# Altium PCB PCB1.PcbDoc (part 1 of 2)
Units mm, origin at the board's own origin, x right, y up, seen from the top; angles counter-clockwise.
Board outline 32 x 32 mm, 4 copper layers (Component Side, Ground Plane, Power Plane, Solder Side), stack 0.844 mm thick; 67 components, 43 nets, 247 pads, 412 vias.
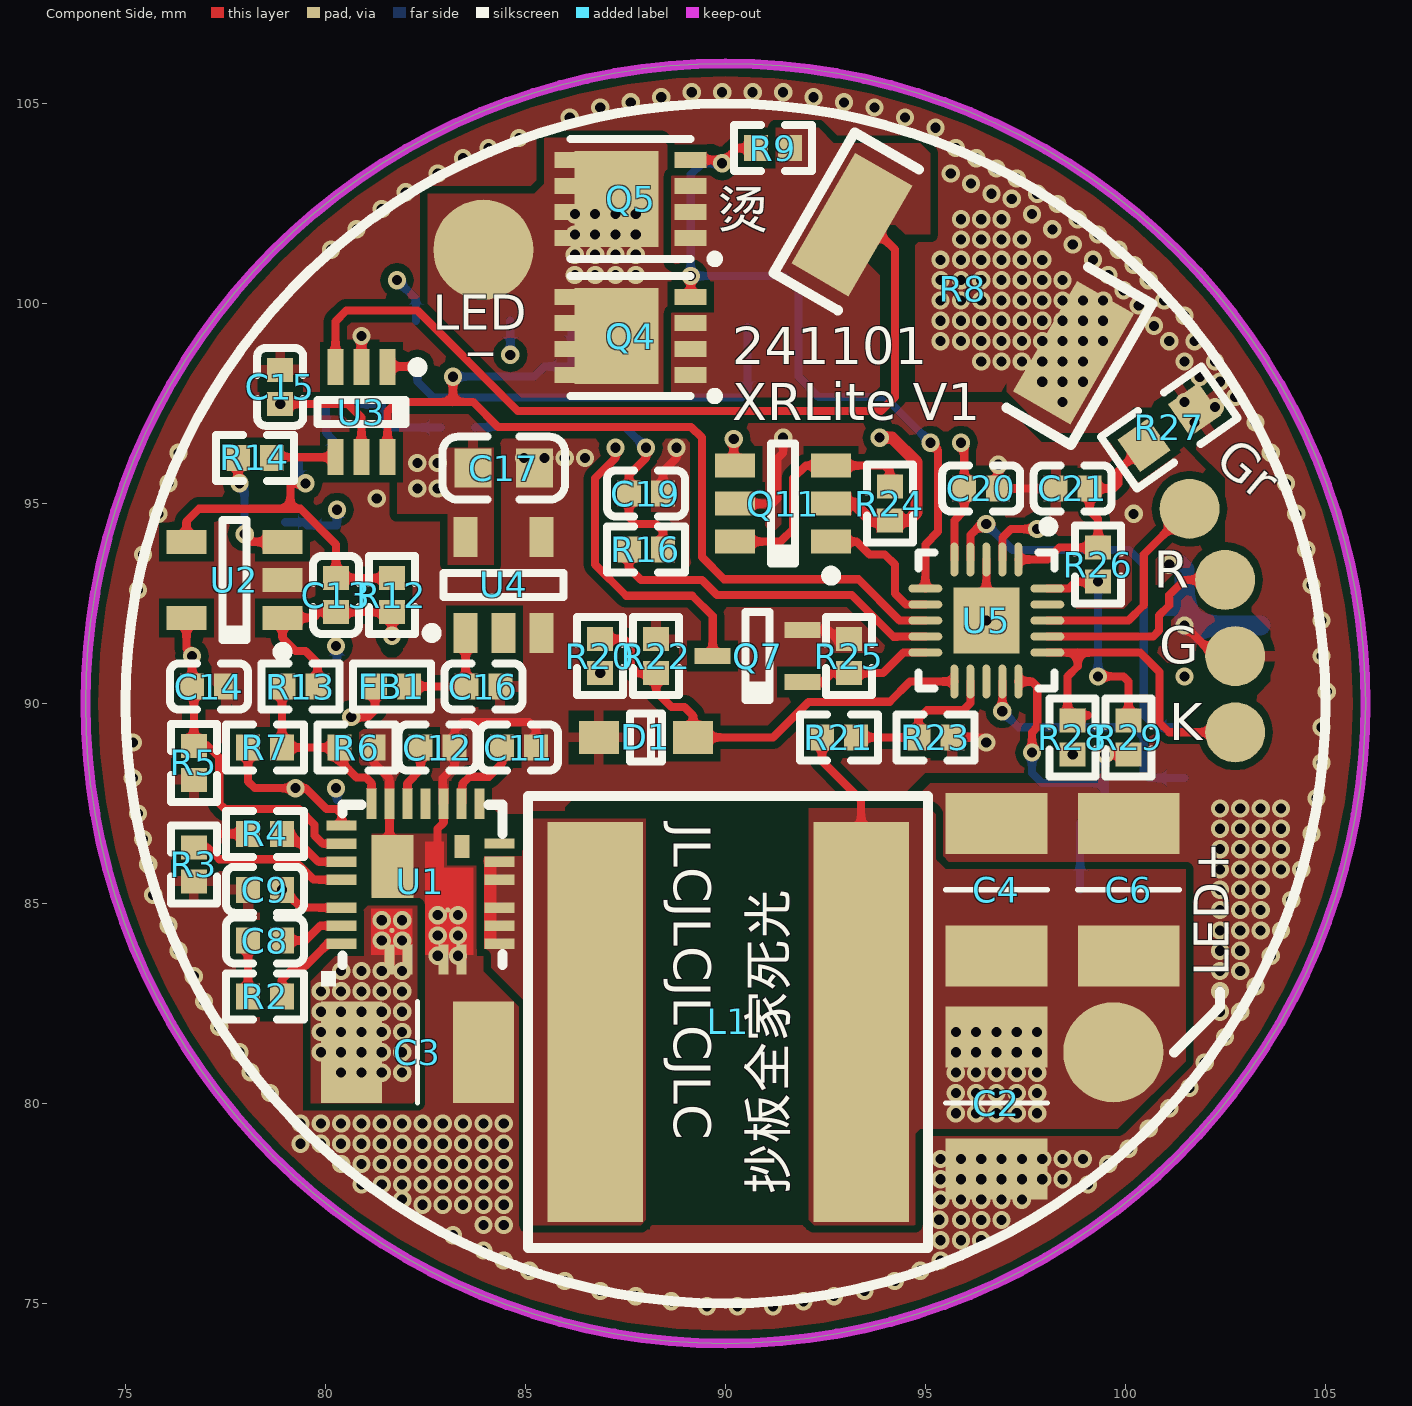
[diagram p0: Component Side view]
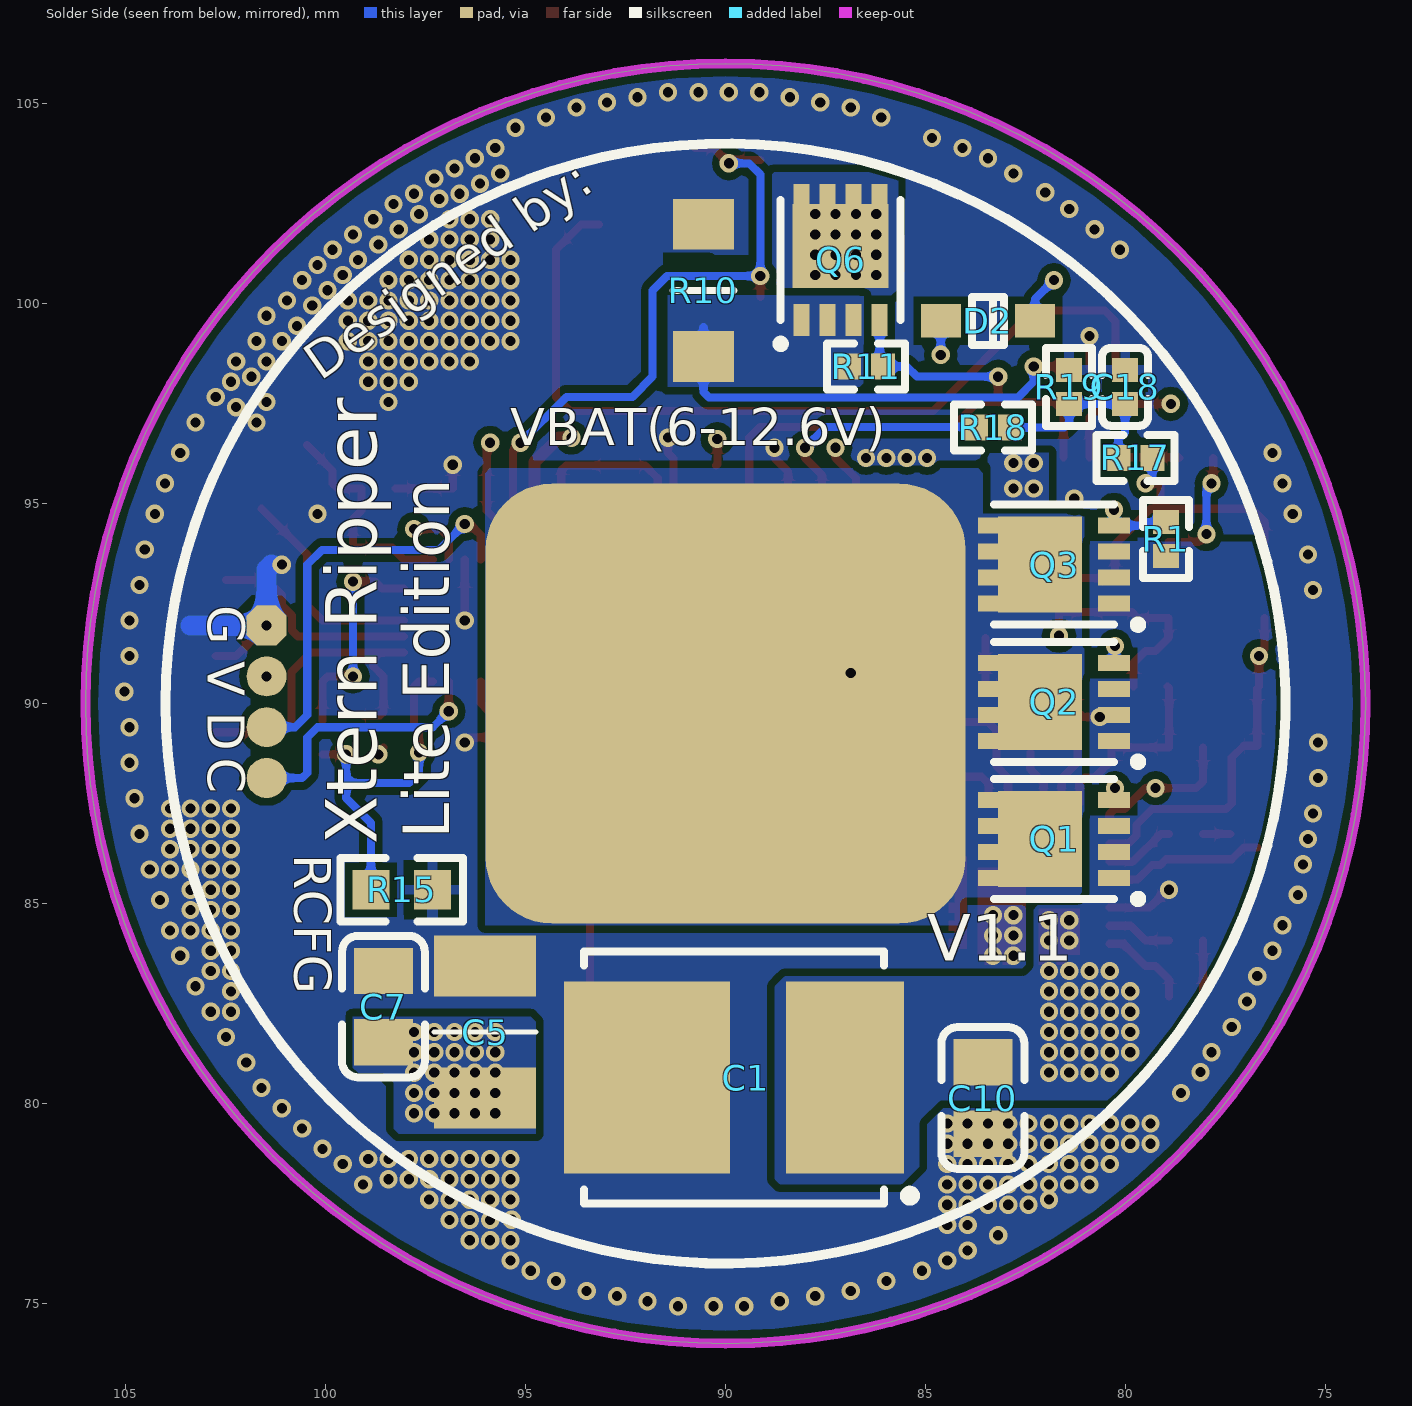
[diagram p1: Solder Side view, seen from below]
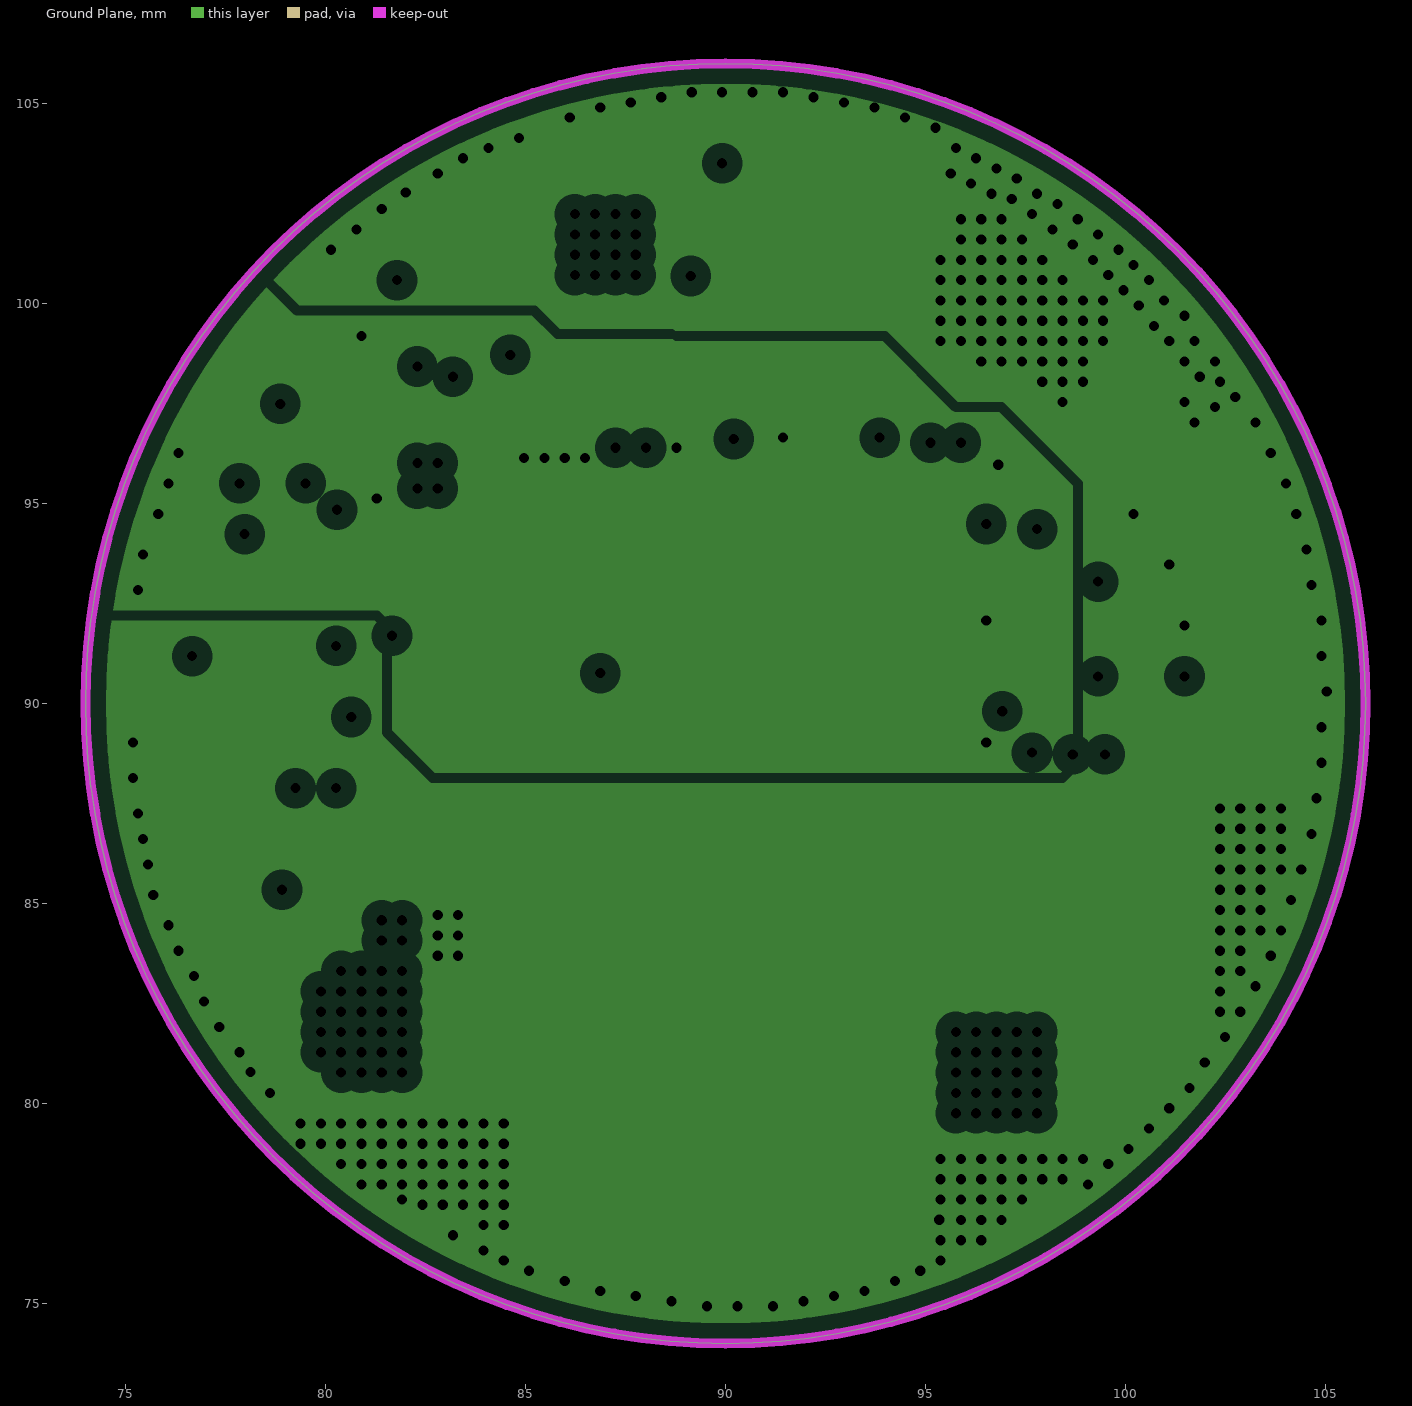
[diagram p2: Ground Plane, clearances drawn from the general rule]
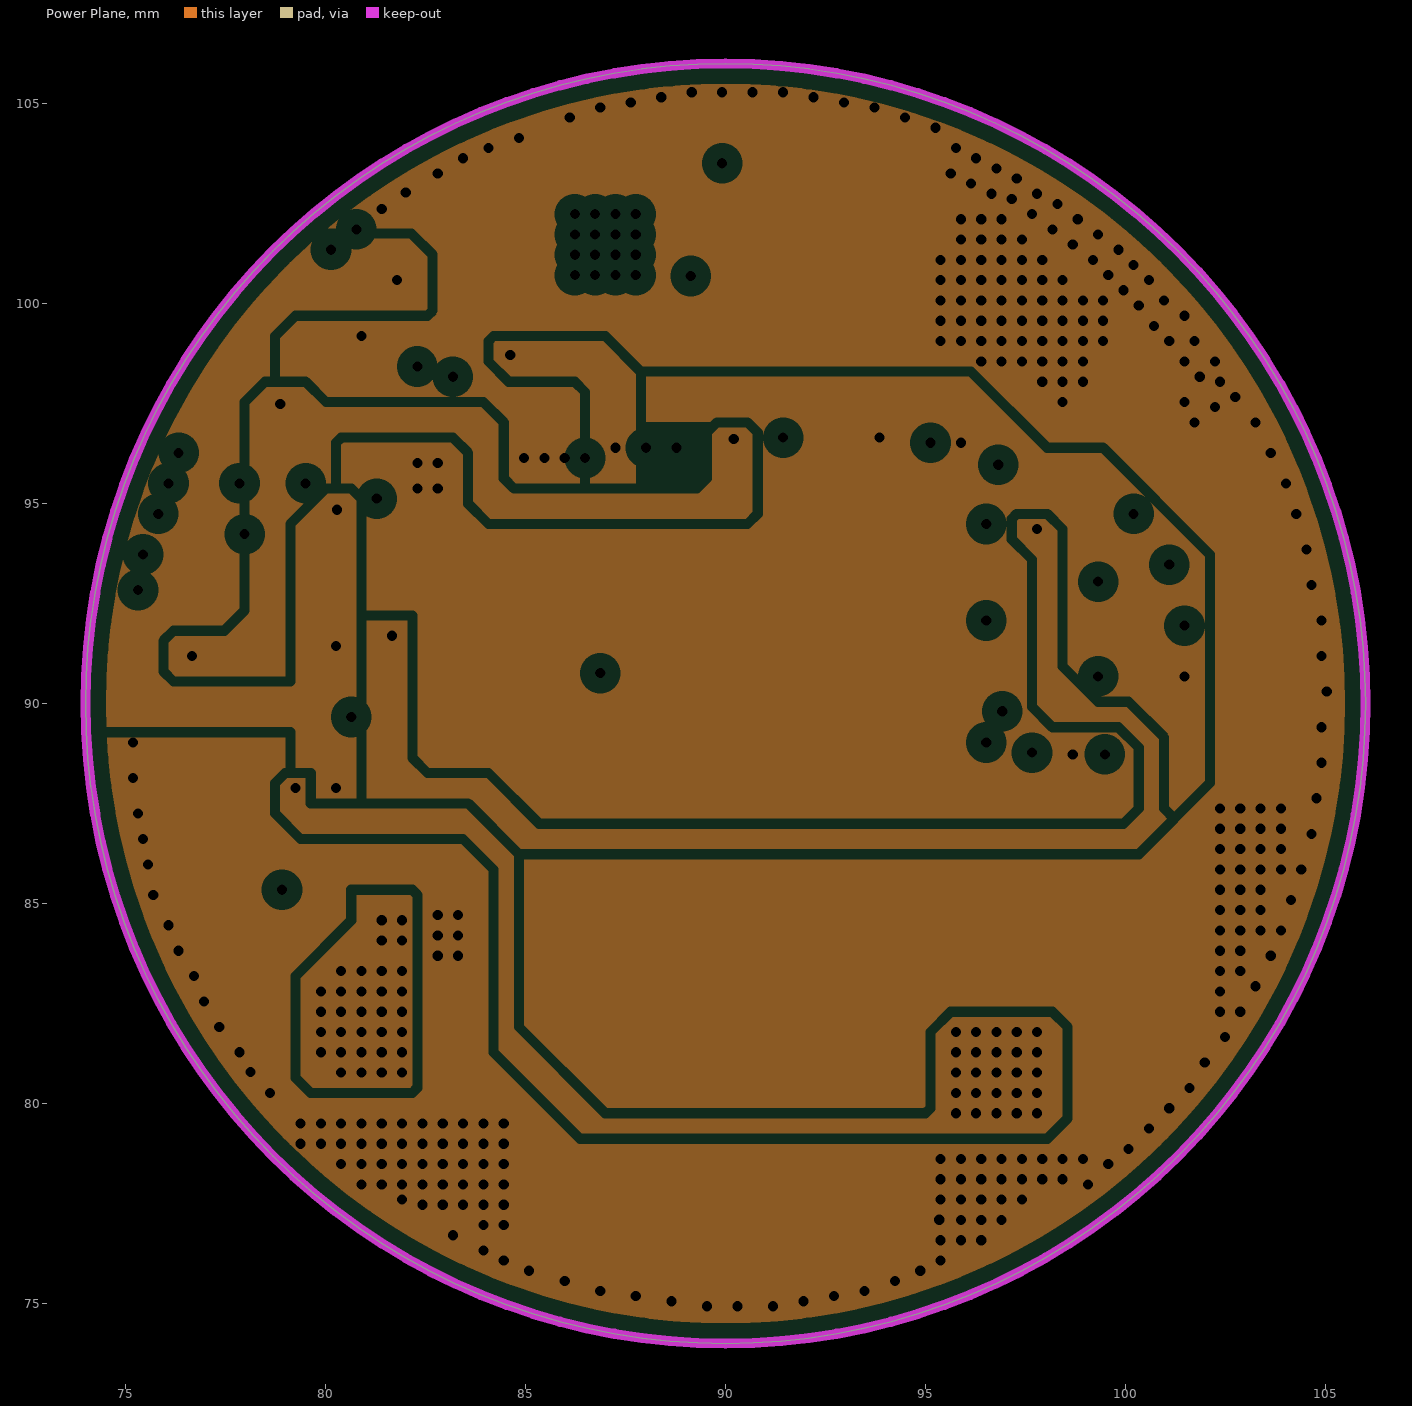
[diagram p3: Power Plane, clearances drawn from the general rule]
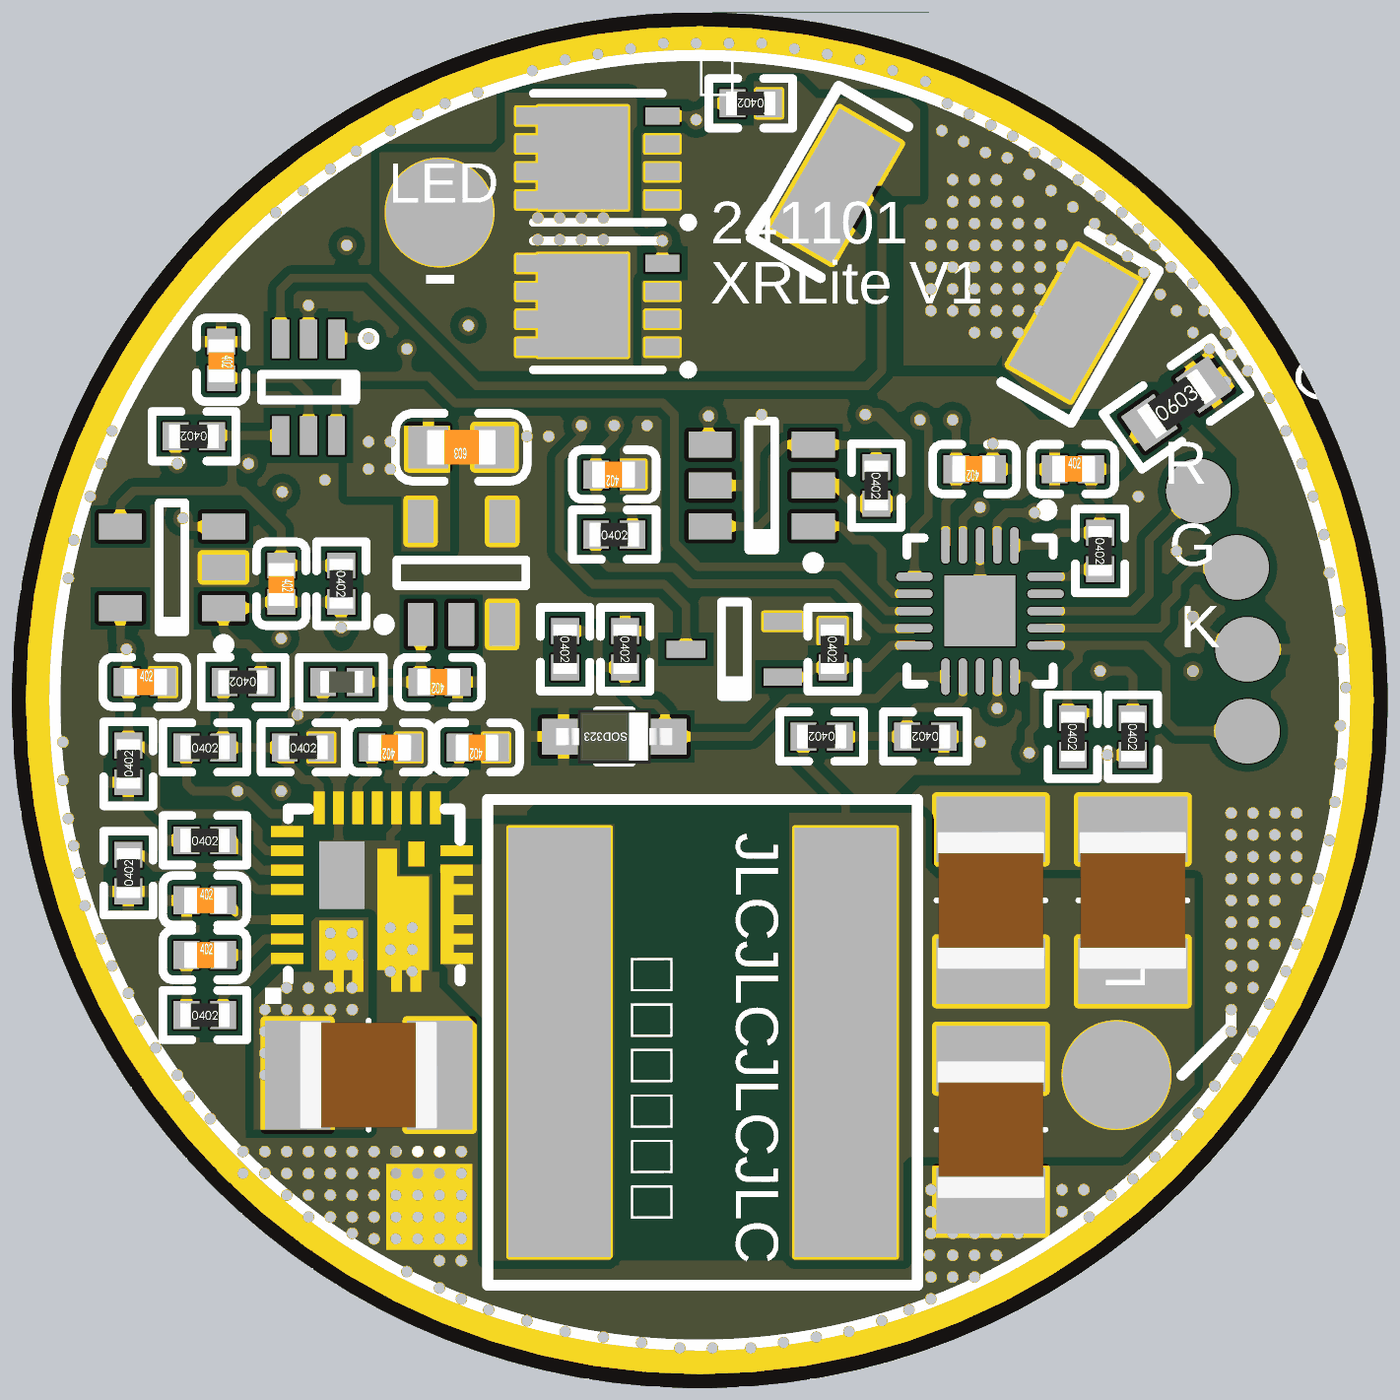
[diagram p5: 3D render of the assembled board from above, using the file's embedded part models]
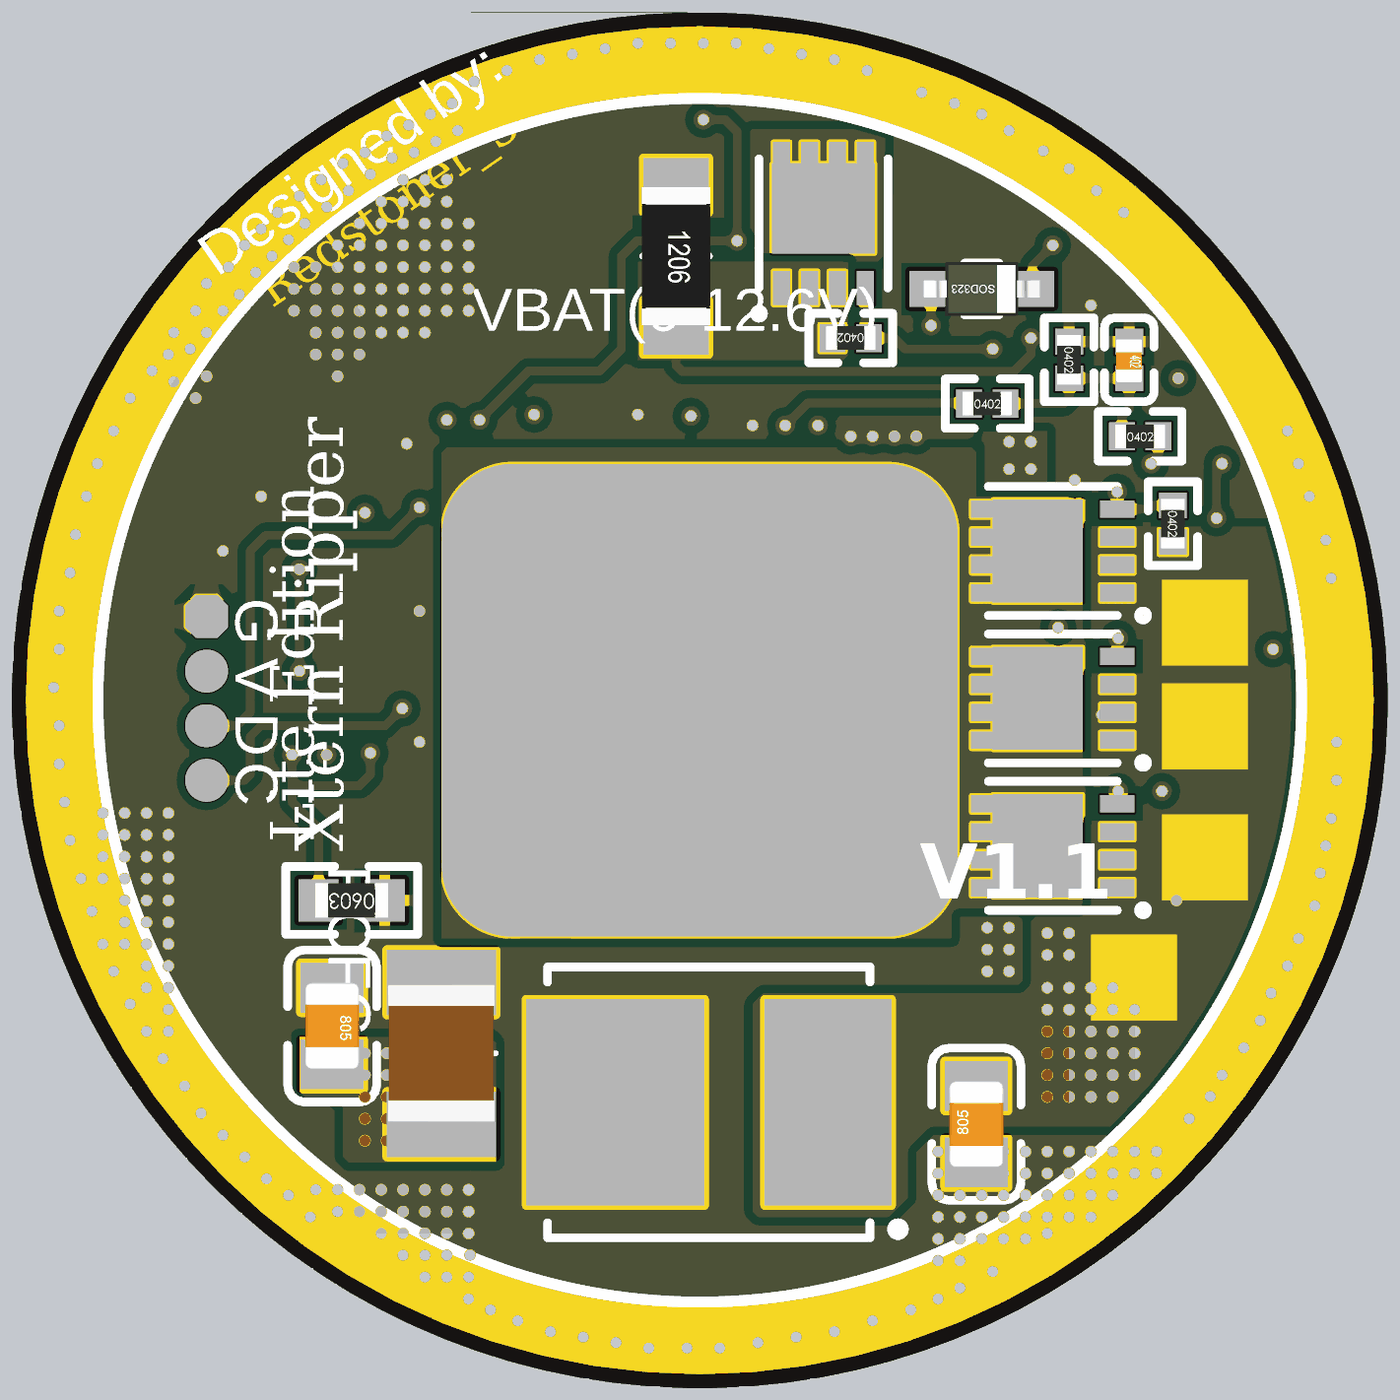
[diagram p6: 3D render of the assembled board from below, using the file's embedded part models]

## Layer stack, top to bottom
Top Solder: solder mask 0.0102, Solder Resist, Dk 3.5
Component Side: signal copper 0.0356
Dielectric 1: core 0.32, FR-4, Dk 4.8
Ground Plane: plane copper 0.036
Dielectric 3: prepreg 0.127, Dk 4.2
Power Plane: plane copper 0.036
Dielectric 4: core 0.254, Dk 4.2
Solder Side: signal copper 0.0356
Bottom Solder: solder mask 0.0102, Solder Resist, Dk 3.5

## Board outline
90,74 cw(c90,90) 74,90 cw(c90,90) 90,106 cw(c90,90) 106,90 cw(c90,90)

## Design rules (kind name [scope] priority, off if disabled: settings)
Clearance [All] p1: gap=0.193
PlaneClearance [All] p1: clearance=0.381
PlaneConnect [All] p1: planeconnectstyle=Direct reliefexpansion=0.508 reliefentries=4 reliefconductorwidth=0.254 reliefairgap=0.254
PolygonConnect PolygonConnect_1 [IsVia] p1: connectstyle=Direct reliefconductorwidth=0.254 reliefentries=4 polygonreliefangle="90 Angle" airgapwidth=0.254
PolygonConnect [All] p2: connectstyle=Relief reliefconductorwidth=0.254 reliefentries=4 polygonreliefangle="90 Angle" airgapwidth=0.254
RoomDefinition main [InComponentClass('main')] p1: confinementstyle=ConfineIn formatcopy=TRUE lockcomponents=FALSE outline 179.451,26.543 206.629,26.543 206.629,36.195 179.451,36.195
RoutingVias [All] p1: holewidth=0.711 width=1.27 viastyle="Through Hole" minholewidth=0.711 minwidth=1.27 maxholewidth=0.711 maxwidth=1.27
SolderMaskExpansion [All] p1: expansion=0.102
Width [All] p1: maxlimit=5.08 minlimit=0.178 preferedwidth=0.254
28 further rules are at their usual default settings.

## Components (designator, comment, footprint, x,y, rotation, side; value= is the part's Value field where it differs from the comment)
C1 "TCN4107M035R0100E" TCN4 89.789,80.645 r0 bottom
C2 "EMK325ABJ107MM-T" 1210C 96.774,80.01 r90 top
C3 "EMK325ABJ107MM-T" 1210C 82.296,81.28 r180 top
C4 "EMK325ABJ107MM-T" 1210C 96.774,85.344 r270 top
C5 "EMK325ABJ107MM-T" 1210C 96.012,81.788 r270 bottom
C6 "EMK325ABJ107MM-T" 1210C 100.076,85.344 r270 top
C7 "22uF (226) 20% 25V" 0805_C 98.552,82.423 r270 bottom
C8 "220nF (224) 10% 16V" 0402_C 78.486,84.074 r0 top
C9 "100nF (104) 10% 16V" 0402_C 78.486,85.344 r0 top
C10 "22uF (226) 20% 25V" 0805_C 83.566,80.137 r90 bottom
C11 "4.7uF (475) 20% 10V" 0402_C 84.836,88.9 r180 top
C12 "4.7uF (475) 20% 10V" 0402_C 82.804,88.9 r180 top
C13 "68nF (683) 10% 50V" 0402_C 80.264,92.71 r270 top
C14 "100nF (104) 10% 16V" 0402_C 77.089,90.424 r0 top
C15 "100nF (104) 10% 16V" 0402_C 78.867,97.917 r270 top
C16 "1.0uF (105) 10% 25V" 0402_C 83.947,90.424 r180 top
C17 "10uF (106) 10% 10V" 0603_C 84.455,95.885 r180 top
C18 "10nF (103) 10% 50V" 0402_C 80.01,97.917 r270 bottom
C19 "470nF (474) 10% 10V" 0402_C 88.011,95.25 r180 top
C20 "100nF (104) 10% 16V" 0402_C 96.393,95.377 r180 top
C21 "1nF (102) 10% 50V" 0402_C 98.679,95.377 r0 top
D1 "1N4148WS T4" SOD-323 88.011,89.154 r180 top
D2 "BZT52C3V9S W5" SOD-323 83.439,99.568 r0 bottom
FB1 "EBMS100505A050" 0402_L 81.661,90.424 r0 top
L1 "XAL1060-122MEB" XAL1010-XXXME 86.741,82.042 r0 top
Q1 "AP80P02DF" DFN-8_L3.0-W3.0-P0.65-BL 81.788,86.614 r90 bottom
Q2 "AP80P02DF" DFN-8_L3.0-W3.0-P0.65-BL 81.788,90.043 r90 bottom
Q3 "AP80P02DF" DFN-8_L3.0-W3.0-P0.65-BL 81.788,93.472 r90 bottom
Q4 "BSZ011NE2LS5IATMA1" DFN-8_L3.0-W3.0-P0.65-BL 87.63,99.187 r90 top
Q5 "BSZ011NE2LS5IATMA1" DFN-8_L3.0-W3.0-P0.65-BL 87.63,102.616 r90 top
Q6 "BSZ050N03MSG" DFN-8_L3.0-W3.0-P0.65-BL 87.122,101.092 r180 bottom
Q7 "2N7002KW" SC70-3 90.805,91.186 r180 top locked
Q11 "DMG6601LVT-7" SOT95P245X110-6N 91.44,94.996 r180 top
R1 "20KΩ (2002) ±1%" 0402_R 78.994,94.107 r270 bottom
R2 "0Ω (0R0) ±1%" 0402_R 78.486,82.677 r0 top
R3 "200KΩ (2003) ±1%" 0402_R 76.708,85.979 r90 top
R4 "100KΩ (1003) ±1%" 0402_R 78.486,86.741 r0 top
R5 "10KΩ (1002) ±1%" 0402_R 76.708,88.519 r90 top
R6 "11KΩ (1002) ±1%" 0402_R 80.772,88.9 r0 top
R7 "110KΩ (1103) ±1%" 0402_R 78.486,88.9 r0 top
R8 "BVT-I-R002-1.0" 2512 97.917,97.409 r150 top
R9 "10KΩ (1002) ±1%" 0402_R 91.186,103.886 r180 top
R10 "RL12FTNR500" 1206R 90.551,100.33 r270 bottom
R11 "10KΩ (1002) ±1%" 0402_R 86.487,98.425 r0 bottom
R12 "7.5MΩ (7504) ±1%" 0402_R 81.661,92.71 r270 top
R13 "91KΩ (9102) ±1%" 0402_R 79.375,90.424 r180 top
R14 "470Ω (4700) ±1%" 0402_R 78.232,96.139 r180 top
R15 "??KΩ ±1%" 0603_R 98.095,85.344 r0 bottom
R16 "10KΩ (1002) ±1%" 0402_R 88.011,93.853 r0 top
R17 "470Ω (4700) ±1%" 0402_R 79.756,96.139 r180 bottom
R18 "100KΩ (1003) ±1%" 0402_R 83.312,96.901 r180 bottom
R19 "1.5KΩ (1501) ±1%" 0402_R 81.407,97.917 r270 bottom
R20 "680K (6803) ±1%" 0402_R 86.868,91.186 r270 top
R21 "470KΩ (4703) ±1%" 0402_R 92.837,89.154 r180 top
R22 "100KΩ (1003) ±1%" 0402_R 88.265,91.186 r270 top
R23 "100KΩ (1003) ±1%" 0402_R 95.25,89.154 r180 top
R24 "20KΩ (2002) ±1%" 0402_R 94.107,94.996 r270 top
R25 "10KΩ (1002) ±1%" 0402_R 93.091,91.186 r270 top
R26 "330KΩ (3303) ±1%" 0402_R 99.314,93.472 r270 top
R27 "SDNT1608X104F4250FTF" 0603_R 101.092,96.901 r35 top
R28 "10KΩ (1002) ±1%" 0402_R 98.679,89.154 r270 top
R29 "200KΩ (2003) ±1%" 0402_R 100.076,89.154 r270 top
U1 "SIC431AED-T1-GE3" QFN_ED-T1-GE3_VIS 82.423,85.471 r90 top
U2 "TLV333IDBVR" SOT95P245X110-5N 77.724,93.091 r180 top
U3 "CH443K" SC70-6 80.899,97.282 r270 top
U4 "TPS7B6950DBVR" SOT95P245X110-5N 84.455,92.964 r90 top
U5 "CMS8S6990NAQN20" QFN40P300X300X800_HS-21N 96.52,92.075 r270 top

## Footprints (in the part's own frame and the unit in brackets; to place one, negate y for a bottom-side part, rotate by r counter-clockwise, add the part's x,y. Pads: shape width x height; smd on the part's side, far side on the other; paste and mask are expansions set on the pad)
0402_C [mm]
  rect 0.6x0.65 smd mask+0.051: 1(-0.425,0) 2(0.425,0)
  silkscreen extent -0.97,-0.58 0.97,0.58, body extent -0.48,-0.3 0.52,0.3, height 0.2
0402_L [mm]
  rect 0.6x0.65 smd mask+0.051: 1(-0.425,0) 2(0.425,0)
  silkscreen extent -0.97,-0.58 0.97,0.58, body extent -0.51,-0.26 0.54,0.26, height 0.36
0402_R [mm]
  rect 0.6x0.65 smd mask+0.051: 1(-0.425,0) 2(0.425,0)
  silkscreen extent -0.97,-0.58 0.97,0.58, body extent -0.57,-0.27 0.58,0.28, height 0.41
0603_C [mm]
  rect 0.93x0.98 smd: 1(-0.77,0) 2(0.77,0)
  silkscreen extent -1.53,-0.79 1.54,0.79, body extent -0.8,-0.4 0.8,0.4, height 0.3
0603_R [mm]
  rect 0.93x0.98 smd: 1(-0.77,0) 2(0.77,0)
  silkscreen extent -1.53,-0.79 1.54,0.79, body extent -0.85,-0.4 0.85,0.4, height 0.56
0805_C [mm]
  rect 1.16x1.47 smd: 1(-0.89,0) 2(0.89,0)
  silkscreen extent -1.77,-1.04 1.77,1.04, body extent -1,-0.63 1,0.62, height 0.77
1206R [mil]
  rect 50x60 smd: 1(-65,0) 2(65,0)
  silkscreen extent 0,-30 0,30, body extent -63,-31 63,31, height 24
1210C [mil]
  rect 60x100 smd: 1(-65,0) 2(65,0)
  silkscreen extent 0,-50 0,50, body extent -63,-49 63,49, height 98
2512 [mm]
  rect 1.65x3.2 smd: 1(0,-1.575) 2(6.401,-1.575)
  silkscreen extent -1.09,-3.61 7.49,0.46
DFN-8_L3.0-W3.0-P0.65-BL [mm]
  rect 0.4x0.8 smd paste-100 mask+0.051: 1(-0.975,-1.5) 2(-0.325,-1.5) 3(0.325,-1.5) 4(0.975,-1.5) 5(0.975,1.5) 6(0.325,1.5) 7(-0.325,1.5) 8(-0.975,1.5)
  rect 2.4x2.1 smd paste-100 mask+0.051: 8(0,0.35)
  silkscreen extent -1.6,-2.2 1.5,1.5, body extent -1.52,-1.52 1.52,1.52, height 1.2
QFN40P300X300X800_HS-21N [mm] "QFN, 20-Leads, Body 3.00x3.00mm, Pitch 0.40mm, Thermal Pad 1.65x1.65mm, IPC Medium Density"
  oval 0.85x0.2 smd mask+0.03: 1(-1.525,0.8) 2(-1.525,0.4) 3(-1.525,0) 4(-1.525,-0.4) 5(-1.525,-0.8) 11(1.525,-0.8) 12(1.525,-0.4) 13(1.525,0) 14(1.525,0.4) 15(1.525,0.8)
  oval 0.2x0.85 smd mask+0.03: 6(-0.8,-1.525) 7(-0.4,-1.525) 8(0,-1.525) 9(0.4,-1.525) 10(0.8,-1.525) 16(0.8,1.525) 17(0.4,1.525) 18(0,1.525) 19(-0.4,1.525) 20(-0.8,1.525)
  rect 1.65x1.65 smd mask+0.03: 21(0,0)
  silkscreen extent -2.47,-1.7 1.7,1.7, body extent -1.55,-1.55 1.55,1.55, height 0.8
QFN_ED-T1-GE3_VIS [mm]
  rect 0.757x0.254 smd paste-0.152 mask+0: 1(-1.873,0.825) 2(-1.873,0.375) 3(-1.873,-0.525) 4(-1.873,-0.975) 11(2.025,-1.425) 12(2.025,-0.975) 13(2.025,-0.525) 14(2.025,-0.075) 15(2.025,0.375) 16(2.025,0.825) 17(2.025,1.275)
  rect 0.254x0.757 smd paste-0.152 mask+0: 5(-1.475,-1.924) 6(-1.025,-1.924) 7(-0.575,-1.924) 8(0.125,-1.924) 9(0.575,-1.924) 10(1.025,-1.925) 18(1.475,2.025) 19(1.025,2.025) 20(0.575,2.025) 21(0.125,2.025) 22(-0.575,2.025) 23(-1.025,2.025) 24(-1.475,2.025)
  rect 1.575x1.05 smd paste+0 mask+0: 25(0.459,0.75)
  round 0.127 smd paste-0.064 mask-0.064: 26(-1.143,0.762) 27(-0.635,-0.635)
  rect 0.58x0.38 smd paste-0.29 mask-0.292: 28(0.956,-0.99)
  Component Side region: 0.429,-1.275 -1.746,-1.275 -1.746,-1.102 -2,-1.101 -2,-0.848 -1.746,-0.847 -1.746,-0.651 -2,-0.651 -2,-0.397 -1.746,-0.397 -1.746,-0.075 1.079,-0.076 1.079,-0.53 0.429,-0.53
  Component Side region: -1.348,-2 -1.602,-2 -1.602,-1.546 0.702,-1.546 0.702,-2 0.446,-2 0.446,-1.848 0.252,-1.848 0.252,-2 -0.001,-2 -0.001,-1.848 -0.449,-1.848 -0.449,-2 -0.702,-2 -0.702,-1.848 -0.898,-1.848 -0.898,-2 -1.152,-2 -1.152,-1.848 -1.348,-1.848
  Component Side region: -2,0.698 -2,0.952 -1.746,0.952 -1.746,1.275 -0.596,1.275 -0.596,0.25 -2,0.25 -2,0.504 -1.746,0.504 -1.746,0.698
  silkscreen extent -2.54,-2 2,2.54, body extent -2,-2 2,2, height 0.8
SC70-3 [mm] "3 Lead SC70(SOT-323) package for small Transistor"
  rect 0.9x0.4 smd mask+0.05: 1(-1.125,0.65) 2(-1.125,-0.65) 3(1.125,0)
  silkscreen extent -0.3,-1.1 0.3,1.1, body extent -0.67,-1.1 0.67,1.1, height 1.1
SC70-6 [mm] "SOT23, 6-Leads, Body 2.00x2.10mm, Pitch 0.65mm, IPC Medium Density"
  rect 0.9x0.4 smd mask+0.05: 1(-1.125,0.65) 2(-1.125,0) 3(-1.125,-0.65) 4(1.125,-0.65) 5(1.125,0) 6(1.125,0.65)
  silkscreen extent -1.25,-1.1 0.3,1.53, body extent -0.67,-1.1 0.67,1.1, height 1.1
SOD-323 [mm]
  rect 1x0.83 smd: 1(1.18,0) 2(-1.18,0)
  silkscreen extent -0.4,-0.6 0.4,0.6, body extent -1.35,-0.62 1.35,0.63, height 1.1
SOT95P245X110-5N [mm] "SOT23, 5-Leads, Body 2.90x2.45mm, Pitch 0.95mm, IPC Medium Density"
  rect 1x0.6 smd: 1(-1.2,0.95) 2(-1.2,0) 3(-1.2,-0.95) 4(1.2,-0.95) 5(1.2,0.95)
  silkscreen extent -1.33,-1.5 0.3,1.92, body extent -0.7,-1.5 0.7,1.5, height 1.1
SOT95P245X110-6N [mm] "SOT23, 6-Leads, Body 2.90x2.45mm, Pitch 0.95mm, IPC Medium Density"
  rect 1x0.6 smd: 1(-1.2,0.95) 2(-1.2,0) 3(-1.2,-0.95) 4(1.2,-0.95) 5(1.2,0) 6(1.2,0.95)
  silkscreen extent -1.33,-1.5 0.3,1.92, body extent -0.7,-1.5 0.7,1.5, height 1.1
TCN4 [mm] "Molded Capacitor, 2-Leads, Body 7.30x6.10mm, IPC Medium Density"
  rect 2.95x4.8 smd: 1(-2.775,0)
  rect 4.15x4.8 smd: 2(2.175,0)
  silkscreen extent -4.52,-3.15 3.75,3.15, body extent -3.75,-3.15 3.75,3.15, height 2
XAL1010-XXXME [mm] "Coilcraft inductor 10x11mm"
  rect 2.38x10 smd mask+0.05: 1(0,0) 2(6.65,0)
  silkscreen extent -1.68,-5.65 8.32,5.65, body extent -1.65,-5.71 8.38,5.71, height 10

## Part data
C1: library part CAP2, "京瓷/AVX 贴片聚合物钽电容器 35V 100uF ±20% 2924 ESR=100mΩ"
C2 C3 C4 C5 C6: library part Cap, "1210尺寸多层陶瓷电容器(MLCC) X5R材质，16V 100uF±20%"
C7 C10: library part "0805 22uF (226) 20% 25V", "贴片电容"
C8: library part "0402 220nF (224) 10% 16V", "贴片电容"
C9 C13 C14 C15 C20: library part "0402 100nF (104) 10% 16V", "贴片电容"
C11 C12: library part "0402 4.7uF (475) 20% 10V", "贴片电容"
C16: library part "0402 1.0uF (105) 10% 25V", "贴片电容"
C17: library part "0603 10uF (106) 10% 10V", "贴片电容"
C18: library part "0402 10nF (103) 10% 50V", "贴片电容"
C19: library part "0402 470nF (474) 10% 10V", "贴片电容"
C21: library part "0402 1nF (102) 10% 50V", "贴片电容"
D1: library part "SOD-323 1N4148WS T4", "二极管"
D2: library part "SOD-323 1N4148WS T4", "SOD-323封装贴片稳压二极管，3.9V 200mW"
FB1: library part "0402 12nH  5%", "贴片磁珠 200mA 5R±25% 100MHz"
L1: library part "Inductor Iron", "Coilcraft Inductor XAL1070 Series"
Q1 Q2 Q3: library part "SON/DFN5x6 MOS", "永源微 PDFN3x3-8L -20V -80A 4.0mΩ P沟道MOSFET"
Q4 Q5: library part "SON/DFN5x6 MOS", "PDFN3x3 37nC 25V 40A 1.1mΩ OptiMOS-5 N沟道MOSFET"
Q6: library part "SON/DFN5x6 MOS", "PDFN3x3 30V 45A 4.6mΩ OptiMOS-3 N沟道MOSFET"
Q7: library part "2N7002 7002", "单N沟道MOSFET(场效应管)"
Q11: library part DMG6601LVT, "SOT23-6 N+P Ch. MOSFET"
R1 R24: library part "0402 20KΩ (2002) 1%", "贴片电阻"
R2: library part "0402 0Ω (0R0) 1%", "贴片电阻"
R3 R4 R13 R18 R22 R23 R29: library part "0402 100KΩ (1003) 1%", "贴片电阻"
R5 R6 R7 R9 R11 R16 R25 R28: library part "0402 10KΩ (1002) 1%", "贴片电阻"
R8: library part Res, "德国伊萨ISA精密检流电阻，2512 3mΩ±1% <50ppm/K"
R10: library part Res, "1206厚膜采样电阻 0.5Ω ±1% 1/2W"
R12: library part "0402 1MΩ (1004) 1%", "贴片电阻"
R14 R17: library part "0402 470Ω (4700) 1%", "贴片电阻"
R15: library part "0603 10KΩ (1002) 1%", "贴片电阻"
R19: library part "0402 1.5KΩ (1501) 1%", "贴片电阻"
R20: library part "0402 680Ω (6800) 1%", "贴片电阻"
R21: library part "0402 470KΩ (4703) 1%", "贴片电阻"
R26: library part "0402 330KΩ (3303) 1%", "贴片电阻"
R27: library part "0603 100KΩ (1003) 1%", "0603贴片NTC热敏电阻，100KΩ (1003) ±1% B4250"
U1: "3 to 24V Input 24A MicroBuck DCDC Converter with bulit-in MOSFET"
U2: "低噪声轨到轨输入输出精密运放 350Khz"
U3: library part NC7SB3157P6X, "Low-Voltage Analog Switch SPDT,1.8-5V Power"
U4: library part TPS7B6933DBVR, "150mA 40V max input Ultra low Iq LDO,fixed 5V output"
U5: library part CM8S6990NA-QFN20, "增强型闪存1T 8051单片机，16KB Flash 256+1K XRAM"

## Free pads (board coordinates)
  round 2.5 smd mask+0.03: 0(83.947,101.346) 0(99.695,81.28)
  round 1 smd far side mask+0.03: 0(101.473,88.138) 1(101.473,90.678) 2(101.473,89.408)
  oct 1x1 smd far side mask+0.03: 2(101.473,91.948)
  round 1.5 smd mask+0.03: 4(101.6,94.869) 4(102.489,93.091) 4(102.743,89.281) 4(102.743,91.186)
  rrect30% 12x11 smd far side mask+0.05: 6(90,90)

## Via types
v1: diameter 0.457, hole 0.254, Component Side to Solder Side, tented both sides, 412 vias

## Nets (pads, with @x,y where several pads share a name; then routed paths per layer and width w, separated by ;. In a path a pad name is that pad's centre, name@x,y a point inside that pad or via, vN(x,y) a via of type N, cw(c..) or ccw(c..) an arc to the next point about the centre after c; other vN are vias at no path point)
5V: C17.2 C20.2 pad.1 Q11.2 R24.2 R28.2 U4.5 U5.5 | length 8.1
  Component Side w0.203: U5.5@95.72,93.6 95.72,94.577 95.968,94.825 C20.2@95.968,95.377 95.968,96.437 v1(95.885,96.52) ; R28.2@98.552,88.9 98.679,88.773 v1(98.679,88.729)
  Component Side w0.305: Q11.2@92.64,94.996 93.218,94.996 93.643,94.571 94.571,94.571 94.777,94.777 94.777,96.035 94.165,96.647 v1(93.853,96.647)
  other v1: 101.473,90.678 82.296,95.377 82.804,95.377 82.296,96.012 82.804,96.012
12V: C1.1 C3.2 C9.2 C10.2 FB1.1 Q1.1 Q1.2 Q1.3 Q2.1 Q2.2 Q2.3 Q3.1 Q3.2 Q3.3 R1.2 U1.1 U1.2 U1.22 U1.26 | length 3
  Component Side w0.203: C9.2@78.867,85.427 79.398,84.896 U1.22@80.398,84.896 ; v1(80.645,89.662) 81.065,89.662 81.236,89.833 FB1.1@81.236,90.424
  other v1: 80.391,80.772 80.899,80.772 81.407,80.772 81.915,80.772 79.883,81.28 80.391,81.28 80.899,81.28 81.407,81.28 81.915,81.28 79.883,81.788 80.391,81.788 80.899,81.788 81.407,81.788 81.915,81.788 79.883,82.296 80.391,82.296 80.899,82.296 81.407,82.296 81.915,82.296 79.883,82.804 80.391,82.804 80.899,82.804 81.407,82.804 81.915,82.804 80.391,83.312 80.899,83.312 81.407,83.312 81.915,83.312 81.407,84.074 81.915,84.074 81.407,84.582 81.915,84.582 78.911,85.344
BATFB: D1.2 R20.1 R22.2 U5.11 | length 11.3
  Component Side w0.203: R20.1@86.995,91.611 87.459,91.611 87.63,91.44 87.63,90.932 87.801,90.761 R22.2@88.392,90.761 ; R22.2@88.265,90.761 88.265,90.297 88.646,89.916 88.977,89.916 89.191,89.702 D1.2@89.191,89.154 91.186,89.154 92.073,90.041 92.502,90.041 92.504,90.043 94.107,90.043 94.615,90.551 95.325,90.551 95.326,90.55 U5.11@95.72,90.55
BST: C8.2 U1.23 | length 1.6
  Component Side w0.203: C8.2@78.911,84.074 79.502,84.074 79.874,84.446 U1.23@80.398,84.446
CELLSET: R15.2 R29.2 U5.15 | length 9
  Component Side w0.203: v1@99.441,88.773 v1(99.485,88.729) R29.2@100.076,88.729
  Component Side w0.208: U5.15@97.32,90.55 97.664,90.55 97.79,90.424 97.79,89.408 97.663,89.281 v1(97.663,88.773)
  Solder Side w0.203: 97.917,88.011 99.485,88.011 ; R15.2@98.865,85.344 98.865,87.016 99.485,87.636 99.485,88.011 ; v1(99.485,88.729) 99.485,88.011
  Solder Side w0.208: v1(97.663,88.773) 97.663,88.265 97.917,88.011
DCDCEN: C14.1 C15.2 Q11.4 R5.2 U1.19 U2.5 U3.5 | length 12.7
  Component Side w0.203: U2.5@76.524,92.141 76.524,91.37 76.664,91.23 C14.1@76.664,90.424 76.708,90.38 R5.2@76.708,88.944 77.045,88.944 77.343,88.646 77.343,87.503 77.485,87.361 79.333,87.361 79.725,86.969 79.725,86.697 79.926,86.496 U1.19@80.398,86.496 ; v1(78.867,97.492) 80.562,97.492 80.899,97.155 U3.5@80.899,96.157 ; v1(90.205,96.612) 90.205,95.981 Q11.4@90.24,95.946
  other v1: 76.664,91.186
DCEN: Q11.1 U5.7 | length 3.4
  Component Side w0.203: Q11.1@92.64,94.046 93.279,94.046 93.599,93.726 93.98,93.726 94.234,93.472 94.234,92.753 94.512,92.475 U5.7@94.995,92.475
DSCK: pad.0@101.473,88.138 U5.14 | length 6.5
  Component Side w0.203: v1@96.901,89.789 v1(96.92,89.808) U5.14@96.92,90.55
  Solder Side w0.203: v1(96.92,89.808) 97.32,89.408 100.203,89.408 100.457,89.154 100.457,88.265 100.584,88.138 pad.0@101.473,88.138
DSDA: pad.2@101.473,89.408 U5.4 | length 10.5
  Component Side w0.203: U5.4@96.12,93.6 96.12,94.215 96.393,94.488 v1(96.52,94.488) v1@96.647,94.488
  Solder Side w0.203: v1(96.52,94.488) 97.17,93.838 100.091,93.838 100.457,93.472 100.457,89.714 100.763,89.408 pad.2@101.473,89.408
GLED: pad.4@101.6,94.869 U5.18 | length 5.5
  Component Side w0.203: U5.18@98.045,92.075 100.076,92.075 100.457,92.456 100.457,93.726 pad.4@101.6,94.869
GND: C1.2 C2.1 C3.1 C4.1 C5.1 C6.1 C7.1 C9.1 C10.1 C11.1 C12.1 C14.2 C15.1 C16.1 C17.1 C18.1 C19.1 C20.1 C21.1 D1.1 pad.2@101.473,91.948 pad.4@102.743,91.186 Q7.2 Q11.5 R3.1 R4.1 R5.1 R6.2 R8.1 R10.1 R15.1 R19.1 R22.1 R23.1 R25.1 R27.2 U1.3 U1.4 U1.13 U1.16 U1.25 U1.27 U2.2 U3.2 U4.3 U4.4 U5.3 U5.21 | length 25.6
  Component Side w0.203: 77.382,86.741 R4.1@78.061,86.741 ; U3.2@80.899,98.407 v1(80.899,99.187) ; R6.2@81.197,88.9 81.197,88.527 81.598,88.126 U1.16@81.598,87.496 81.598,86.005 U1.25@81.673,85.93 ; 82.677,86.106 82.804,86.233 82.804,86.868 82.948,87.012 U1.13@82.948,87.496 82.931,87.513 82.931,88.138 83.229,88.436 C12.1@83.229,88.9 83.229,89.325 83.439,89.535 85.09,89.535 85.261,89.364 C11.1@85.261,88.9 ; C19.1@88.436,95.25 88.436,95.802 88.773,96.139 v1(88.773,96.393) ; Q11.5@90.24,94.996 91.171,94.996 91.298,95.123 91.298,96.124 91.44,96.266 v1(91.44,96.647) ; Q7.2@91.93,91.836 92.568,91.836 92.793,91.611 R25.1@93.091,91.611 ; R23.1@95.675,89.154 96.393,89.154 v1(96.52,89.027) ; v1(96.52,92.075) U5.3@96.52,93.6 ; v1@96.774,96.012 v1(96.818,95.968) C20.1@96.818,95.377 C21.1@98.254,95.377 ; v1(101.473,91.948) 102.235,91.186 pad.4@102.743,91.186
  Solder Side w0.5: 101.346,93.472 101.473,93.345 v1(101.473,91.948) 103.378,91.948
  other v1: 89.535,74.93 90.297,74.93 91.186,74.93 88.646,75.057 91.948,75.057 87.757,75.184 92.71,75.184 86.868,75.311 93.472,75.311 85.979,75.565 94.234,75.565 85.09,75.819 94.869,75.819 84.455,76.073 95.377,76.073 83.947,76.327 95.377,76.581 95.885,76.581 96.393,76.581 83.185,76.708 83.947,76.962 84.455,76.962 95.345,77.095 95.885,77.089 96.393,77.089 96.901,77.089 82.423,77.47 82.931,77.47 83.439,77.47 83.947,77.47 84.455,77.47 81.915,77.597 95.377,77.597 95.885,77.597 96.393,77.597 96.901,77.597 97.409,77.597 80.899,77.978 81.407,77.978 81.915,77.978 82.423,77.978 82.931,77.978 83.439,77.978 83.947,77.978 84.455,77.978 99.06,77.978 95.377,78.105 95.885,78.105 96.393,78.105 96.901,78.105 97.409,78.105 97.917,78.105 98.425,78.105 80.391,78.486 80.899,78.486 81.407,78.486 81.915,78.486 82.423,78.486 82.931,78.486 83.439,78.486 83.947,78.486 84.455,78.486 99.568,78.486 95.377,78.613 95.885,78.613 96.393,78.613 96.901,78.613 97.409,78.613 97.917,78.613 98.425,78.613 98.933,78.613 100.076,78.867 79.375,78.994 79.883,78.994 80.391,78.994 80.899,78.994 81.407,78.994 81.915,78.994 82.423,78.994 82.931,78.994 83.439,78.994 83.947,78.994 84.455,78.994 100.584,79.375 79.375,79.502 79.883,79.502 80.391,79.502 80.899,79.502 81.407,79.502 81.915,79.502 82.423,79.502 82.931,79.502 83.439,79.502 83.947,79.502 84.455,79.502 101.092,79.883 78.613,80.264 101.6,80.391 78.124,80.784 101.981,81.026 77.851,81.28 102.489,81.661 77.343,81.915 102.362,82.296 102.87,82.296 76.962,82.55 102.362,82.804 103.251,82.931 76.708,83.185 102.362,83.312 102.87,83.312 82.804,83.693 83.312,83.693 103.632,83.693 76.327,83.82 102.362,83.82 102.87,83.82 82.804,84.201 83.312,84.201 102.362,84.328 102.87,84.328 103.378,84.328 103.886,84.328 76.073,84.455 82.804,84.709 83.312,84.709 102.362,84.836 102.87,84.836 103.378,84.836 104.14,85.09 75.692,85.217 102.362,85.344 102.87,85.344 103.378,85.344 102.362,85.852 102.87,85.852 103.378,85.852 103.886,85.852 104.394,85.852 75.565,85.979 102.362,86.36 102.87,86.36 103.378,86.36 103.886,86.36 75.438,86.614 104.648,86.741 102.362,86.868 102.87,86.868 103.378,86.868 103.886,86.868 75.311,87.249 102.362,87.376 102.87,87.376 103.378,87.376 103.886,87.376 104.775,87.63 75.184,88.138 104.902,88.519 75.184,89.027 104.902,89.408 105.029,90.297 104.902,91.186 104.902,92.075 75.311,92.837 104.648,92.964 101.092,93.472 75.438,93.726 104.521,93.853 75.819,94.742 100.203,94.742 104.267,94.742 81.28,95.123 76.073,95.504 104.013,95.504 84.963,96.139 85.471,96.139 85.979,96.139 86.487,96.139 76.327,96.266 103.632,96.266 101.727,97.028 103.251,97.028 102.235,97.409 98.425,97.536 101.473,97.536 102.743,97.663 97.917,98.044 98.425,98.044 98.933,98.044 102.362,98.044 101.854,98.171 96.393,98.552 96.901,98.552 97.409,98.552 97.917,98.552 98.425,98.552 98.933,98.552 101.473,98.552 102.235,98.552 95.377,99.06 95.885,99.06 96.393,99.06 96.901,99.06 97.409,99.06 97.917,99.06 98.425,99.06 98.933,99.06 99.441,99.06 101.092,99.06 101.727,99.06 100.711,99.441 95.377,99.568 95.885,99.568 96.393,99.568 96.901,99.568 97.409,99.568 97.917,99.568 98.425,99.568 98.933,99.568 99.441,99.568 101.473,99.695 100.33,99.949 95.377,100.076 95.885,100.076 96.393,100.076 96.901,100.076 97.409,100.076 97.917,100.076 98.425,100.076 98.933,100.076 99.441,100.076 100.965,100.076 99.949,100.33 95.377,100.584 95.885,100.584 96.393,100.584 96.901,100.584 97.409,100.584 97.917,100.584 98.425,100.584 100.584,100.584 99.568,100.711 100.203,100.965 95.377,101.092 95.885,101.092 96.393,101.092 96.901,101.092 97.409,101.092 97.917,101.092 99.187,101.092 80.137,101.346 99.822,101.346 98.679,101.473 95.885,101.6 96.393,101.6 96.901,101.6 97.409,101.6 99.314,101.727 80.772,101.854 98.171,101.854 95.885,102.108 96.393,102.108 96.901,102.108 98.806,102.108 97.663,102.235 81.407,102.362 98.298,102.489 97.155,102.616 96.647,102.743 97.79,102.743 82.007,102.778 96.139,102.997 97.282,103.124 82.804,103.251 95.631,103.251 96.774,103.378 83.439,103.632 96.266,103.632 84.074,103.886 95.758,103.886 84.836,104.14 95.25,104.394 86.106,104.648 94.488,104.648 86.868,104.902 93.726,104.902 87.63,105.029 92.964,105.029 88.392,105.156 92.202,105.156 89.154,105.283 89.916,105.283 90.678,105.283 91.44,105.283
GRP: D2.2 Q1.4 Q2.4 Q3.4 R1.1 | length 3.8
  Solder Side w0.203: R1.1@78.994,94.532 79.458,94.532 79.543,94.447 Q3.4@80.288,94.447 v1(80.288,94.845) v1@80.264,94.869 ; v1@80.264,88.011 80.288,87.987 Q1.4@80.288,87.589 ; v1(80.264,91.44) 80.288,91.416 Q2.4@80.288,91.018 ; v1(81.788,100.584) 82.259,100.113 D2.2@82.259,99.568
  other v1: 80.264,87.884
IFB: R14.1 U3.4 | length 1.6
  Component Side w0.203: R14.1@78.657,96.139 78.675,96.157 U3.4@80.249,96.157
INTVCC: C12.2 U1.15 | length 1.4
  Component Side w0.203: U1.15@82.048,87.496 82.048,88.017 82.379,88.348 C12.2@82.379,88.773
KEY: pad.4@102.743,89.281 R28.1 U5.16 | length 8.4
  Component Side w0.203: U5.16@98.045,91.275 98.806,91.275 ; 99.06,89.706 98.635,89.706 98.552,89.789 98.552,90.678 98.806,90.932 98.806,91.275 ; pad.4@102.743,89.281 101.092,89.281 100.853,89.52 100.853,90.79 100.368,91.275 99.314,91.275 98.806,91.275
LED-: pad.0@83.947,101.346 Q4.5 Q4.6 Q4.7 Q4.8 Q5.5 Q5.6 Q5.7 Q5.8 Q6.5 Q6.6 Q6.7 Q6.8
  other v1: 86.233,100.711 86.741,100.711 87.249,100.711 87.757,100.711 86.233,101.219 86.741,101.219 87.249,101.219 87.757,101.219 86.233,101.727 86.741,101.727 87.249,101.727 87.757,101.727 86.233,102.235 86.741,102.235 87.249,102.235 87.757,102.235
MODE1: R3.2 U1.21 | length 4
  Component Side w0.203: R3.2@76.708,86.404 77.045,86.404 77.343,86.106 78.986,86.106 79.128,85.964 79.333,85.964 79.699,85.598 80.396,85.598 U1.21@80.398,85.596
MODE2: R4.2 U1.20 | length 1.8
  Component Side w0.203: R4.2@78.911,86.741 79.116,86.741 79.811,86.046 U1.20@80.398,86.046
NetC8_1: C8.1 R2.1 | length 1.4
  Component Side w0.203: R2.1@78.061,82.677 C8.1@78.061,84.074
NetC18_2: C18.2 R17.1 R18.2 R19.2 | length 4.8
  Solder Side w0.203: R17.1@80.181,96.139 80.181,96.603 80.01,96.774 C18.2@80.01,97.492 R19.2@81.407,97.492 81.407,97.028 81.534,96.901 R18.2@82.887,96.901
NetC19_2: C19.2 R16.2 R18.1 | length 7.9
  Component Side w0.203: v1(88.011,96.393) 88.011,96.139 87.586,95.714 C19.2@87.586,95.25 87.586,94.659 87.757,94.488 88.265,94.488 88.436,94.317 R16.2@88.436,93.853
  Solder Side w0.203: R18.1@83.737,96.901 83.752,96.916 87.488,96.916 v1(88.011,96.393)
NetD2_1: D2.1 Q7.3 | length 8.5
  Component Side w0.203: v1(87.249,96.393) 87.249,96.139 86.741,95.631 86.741,93.472 87.518,92.695 89.169,92.695 89.68,92.184 Q7.3@89.68,91.186
  Solder Side w0.203: v1@84.582,98.679 v1(84.619,98.716) D2.1@84.619,99.568
NetR14_2: R14.2 U2.3 | length 3
  Component Side w0.203: R14.2@77.807,96.139 77.807,95.548 v1(77.851,95.504) ; v1(77.978,94.234) 78.171,94.041 U2.3@78.924,94.041
  Solder Side w0.203: v1(77.851,95.504) 77.978,95.377 v1(77.978,94.234)
OP-: C13.1 R12.1 R17.2 U2.4 | length 8.7
  Component Side w0.203: U2.4@76.524,94.041 76.524,94.558 76.835,94.869 79.121,94.869 ; v1(79.502,95.504) 79.121,95.504 79.121,94.869 ; R12.1@81.661,93.135 C13.1@80.264,93.135 80.264,93.98 79.375,94.869 79.121,94.869
  Solder Side w0.203: R17.2@79.331,96.139 79.331,95.675 v1(79.502,95.504)
OPOUT: C13.2 R12.2 R13.1 U2.1 U5.2 | length 7.1
  Component Side w0.203: R13.1@79.8,90.424 79.8,91.015 79.502,91.313 79.248,91.313 78.924,91.637 U2.1@78.924,92.141 79.695,92.141 79.839,92.285 C13.2@80.264,92.285 R12.2@81.661,92.285 v1(81.661,91.694) ; U5.2@96.92,93.6 96.92,94.148 97.133,94.361 v1(97.79,94.361)
OUTFB: R21.1 R23.2 U5.12 | length 4
  Component Side w0.203: R21.1@93.262,89.154 R23.2@94.825,89.154 94.825,89.618 95.037,89.83 95.942,89.83 96.12,90.009 U5.12@96.12,90.55
PG: Q11.3 Q11.6 R24.1 | length 5.8
  Component Side w0.203: Q11.6@90.24,94.046 91.379,94.046 91.694,94.361 91.694,95.631 92.009,95.946 Q11.3@92.64,95.946 93.98,95.946
  Component Side w0.208: 93.98,95.946 94.107,95.819 R24.1@94.107,95.421
PHASE: R2.2 U1.24 | length 2.3
  Component Side w0.203: R2.2@78.911,82.677 78.911,83.102 79.248,83.439 79.502,83.439 80.059,83.996 U1.24@80.398,83.996
PWM: R16.1 U5.9 | length 8.6
  Component Side w0.203: R16.1@87.586,93.853 87.586,93.389 87.884,93.091 89.408,93.091 89.789,92.71 93.154,92.71 94.195,91.67 94.284,91.67 94.286,91.671 94.991,91.671 U5.9@94.995,91.675
RLED: pad.4@102.489,93.091 U5.17 | length 5.4
  Component Side w0.203: U5.17@98.045,91.675 100.692,91.675 100.838,91.821 100.838,92.202 101.092,92.456 101.092,92.71 101.473,93.091 pad.4@102.489,93.091
RPEN: Q7.1 R25.2 U5.10 | length 3.4
  Component Side w0.203: Q7.1@91.93,90.536 92.441,90.536 92.666,90.761 R25.2@93.091,90.761 93.936,90.761 94.45,91.275 U5.10@94.995,91.275
SW: L1.1 U1.5 U1.6 U1.7 U1.8 U1.9
TEMPSEN: C21.2 R26.1 R27.1 U5.1 | length 5.7
  Component Side w0.203: U5.1@97.32,93.6 98.045,93.6 98.342,93.897 R26.1@99.314,93.897 99.314,94.615 99.104,94.825 C21.2@99.104,95.377 99.695,95.377 99.822,95.504 99.822,95.82 R27.1@100.461,96.459
TSEN: R26.2 R29.1 U5.20 | length 5.5
  Component Side w0.203: U5.20@98.045,92.875 98.59,92.875 98.762,93.047 v1(99.314,93.047) ; v1(99.314,90.678) 99.949,90.678 100.076,90.551 R29.1@100.076,89.579
  Solder Side w0.203: v1(99.314,90.678) v1(99.314,93.047)